# EAGLE board nav (EAGLE 8.2.0)

Size 160 x 100 mm. Coordinates in mm from the lower left corner, seen from the top.
Outline: 0,0 160,0 160,100 0,100 0,0
Copper layers (1*16): Top 0.035mm / dielectric 1.5mm / Bottom 0.035mm
Design rules "default": minimum track width 6mil, minimum drill 0.35mm, track to track 6mil, track to pad 6mil, pad to pad 6mil, via to via 6mil, smd to smd 6mil, copper to edge 40mil, drill to drill 6mil, minimum pad ring 10mil, minimum via ring 8mil, stop-mask expansion 4mil, vias tented up to drill 0mil, thermal gap 10mil

## Footprints (pad centres in the part's own frame; a part is rotated, then mirrored left to right if it is on the bottom)
1X09-BIG = drill 1.016 pad 1.778 octagon: 1 -10.16,0; 2 -7.62,0; 3 -5.08,0; 4 -2.54,0; 5 0,0; 6 2.54,0; 7 5.08,0; 8 7.62,0; 9 10.16,0
1X06 = drill 1.016 octagon: 1 -6.35,0; 2 -3.81,0; 3 -1.27,0; 4 1.27,0; 5 3.81,0; 6 6.35,0
MA03-1 = drill 1.016 long: 1 -2.54,0; 2 0,0; 3 2.54,0
TSSOP20 = smd 0.305 x 0.991: 1 -2.925,-2.918; 2 -2.275,-2.918; 3 -1.625,-2.918; 4 -0.975,-2.918; 5 -0.325,-2.918; 6 0.325,-2.918; 7 0.975,-2.918; 8 1.625,-2.918; 9 2.275,-2.918; 10 2.925,-2.918; 11 2.925,2.918; 12 2.275,2.918; 13 1.625,2.918; 14 0.975,2.918; 15 0.325,2.918; 16 -0.325,2.918; 17 -0.975,2.918; 18 -1.625,2.918; 19 -2.275,2.918; 20 -2.925,2.918

## Placement (x,y rotation side)
JP1  [1X09-BIG]  2.54,40.64 90 top
JP2  [1X06]  15.24,2.54 0 top
SV1  [MA03-1]  43.18,2.54 0 top
U1  [TSSOP20]  36.83,35.56 0 top

## Library data of the parts
JP1 JP2 U1 = adafruit; OC_NEWARK: unknown
SV1 = con-lstb; OC_FARNELL: unknown; OC_NEWARK: unknown

## Nets
+3V3: JP1.2 JP1.9 JP2.2 SV1.3 U1.2
+5V: U1.19
GND: JP1.8 JP2.1 SV1.2 U1.11
GPS_RX: SV1.1
MISO3: JP1.1 JP2.3 U1.9
MISO5: U1.12
MOSI3: JP1.4 JP2.4 U1.8
MOSI5: U1.13
SCK3: JP1.3 JP2.5 U1.7
SCK5: U1.14
SCREEN_CS: JP1.7 U1.4
SCREEN_DC: JP1.5 U1.6
SCREEN_RESET: JP1.6 U1.5
SD_CS: JP2.6 U1.1

## Tracks (layer width: path | path; a pad name or v marks a point on that pad's centre or on a via)
+3V3  (4 unrouted)
GND  (3 unrouted)
MISO3  (2 unrouted)
MOSI3  (2 unrouted)
SCK3  (2 unrouted)
SCREEN_CS  (1 unrouted)
SCREEN_DC  (1 unrouted)
SCREEN_RESET  (1 unrouted)
SD_CS  (1 unrouted)